# EAGLE board LED_Matrix (EAGLE 6.2)
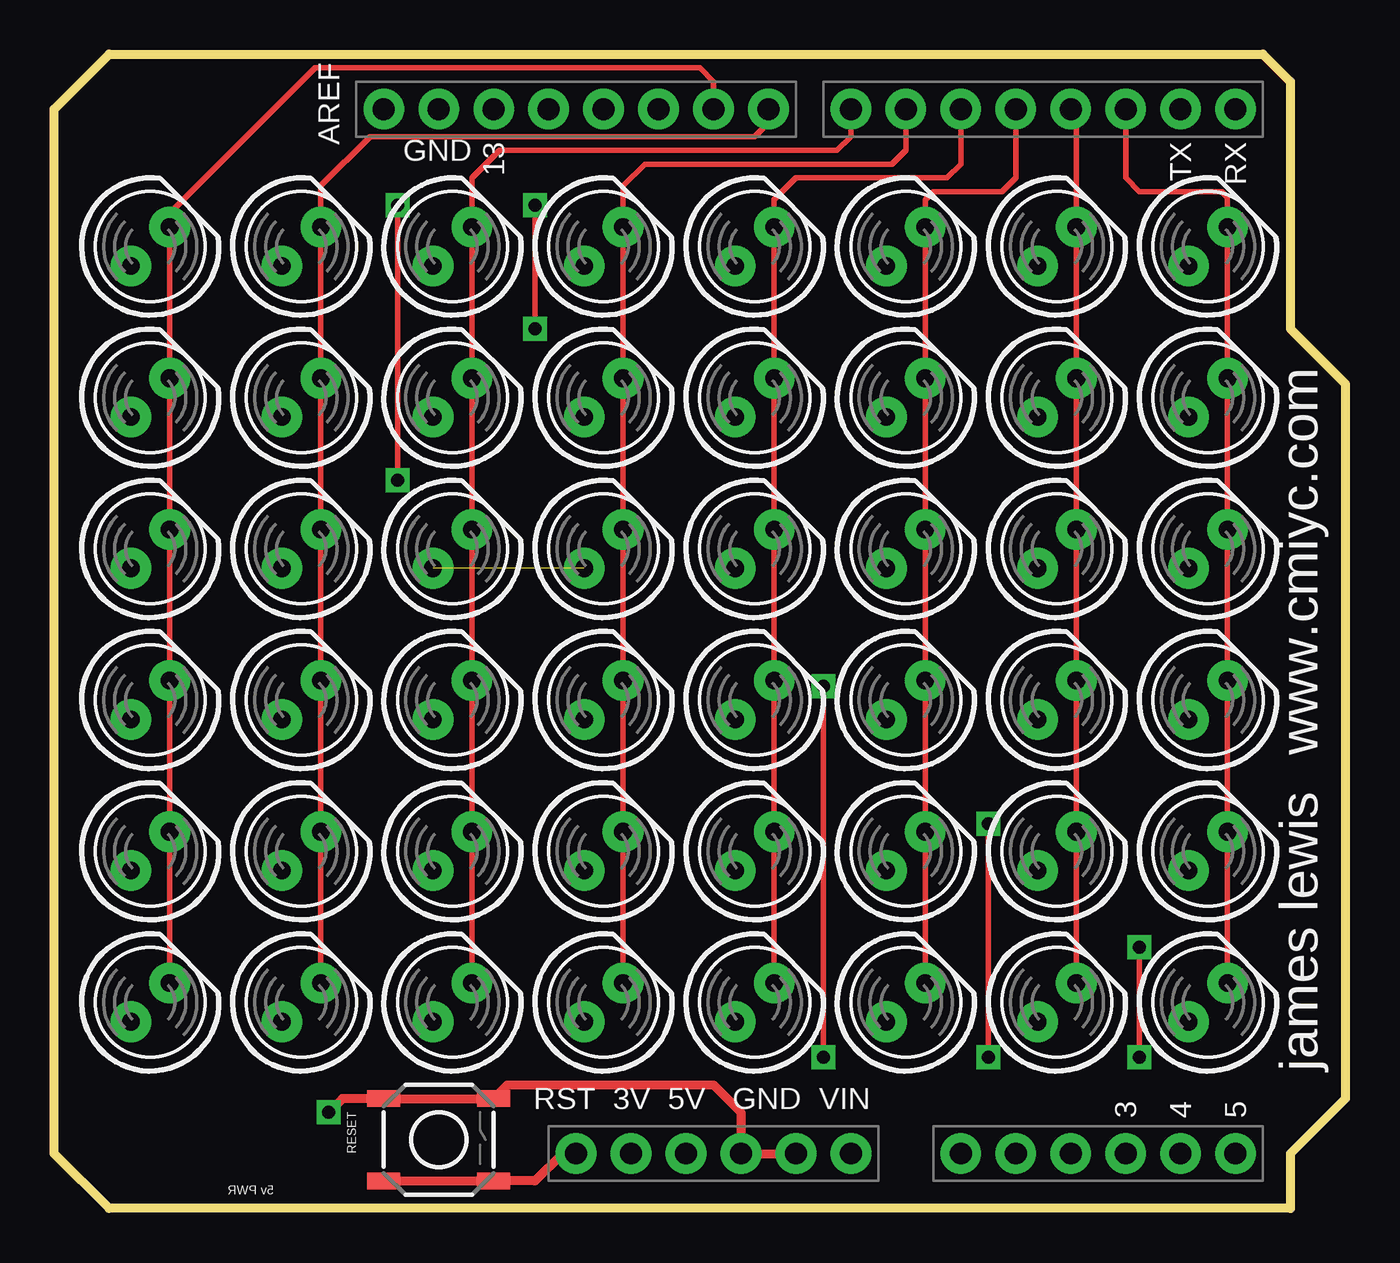
[diagram p0: board, top side]
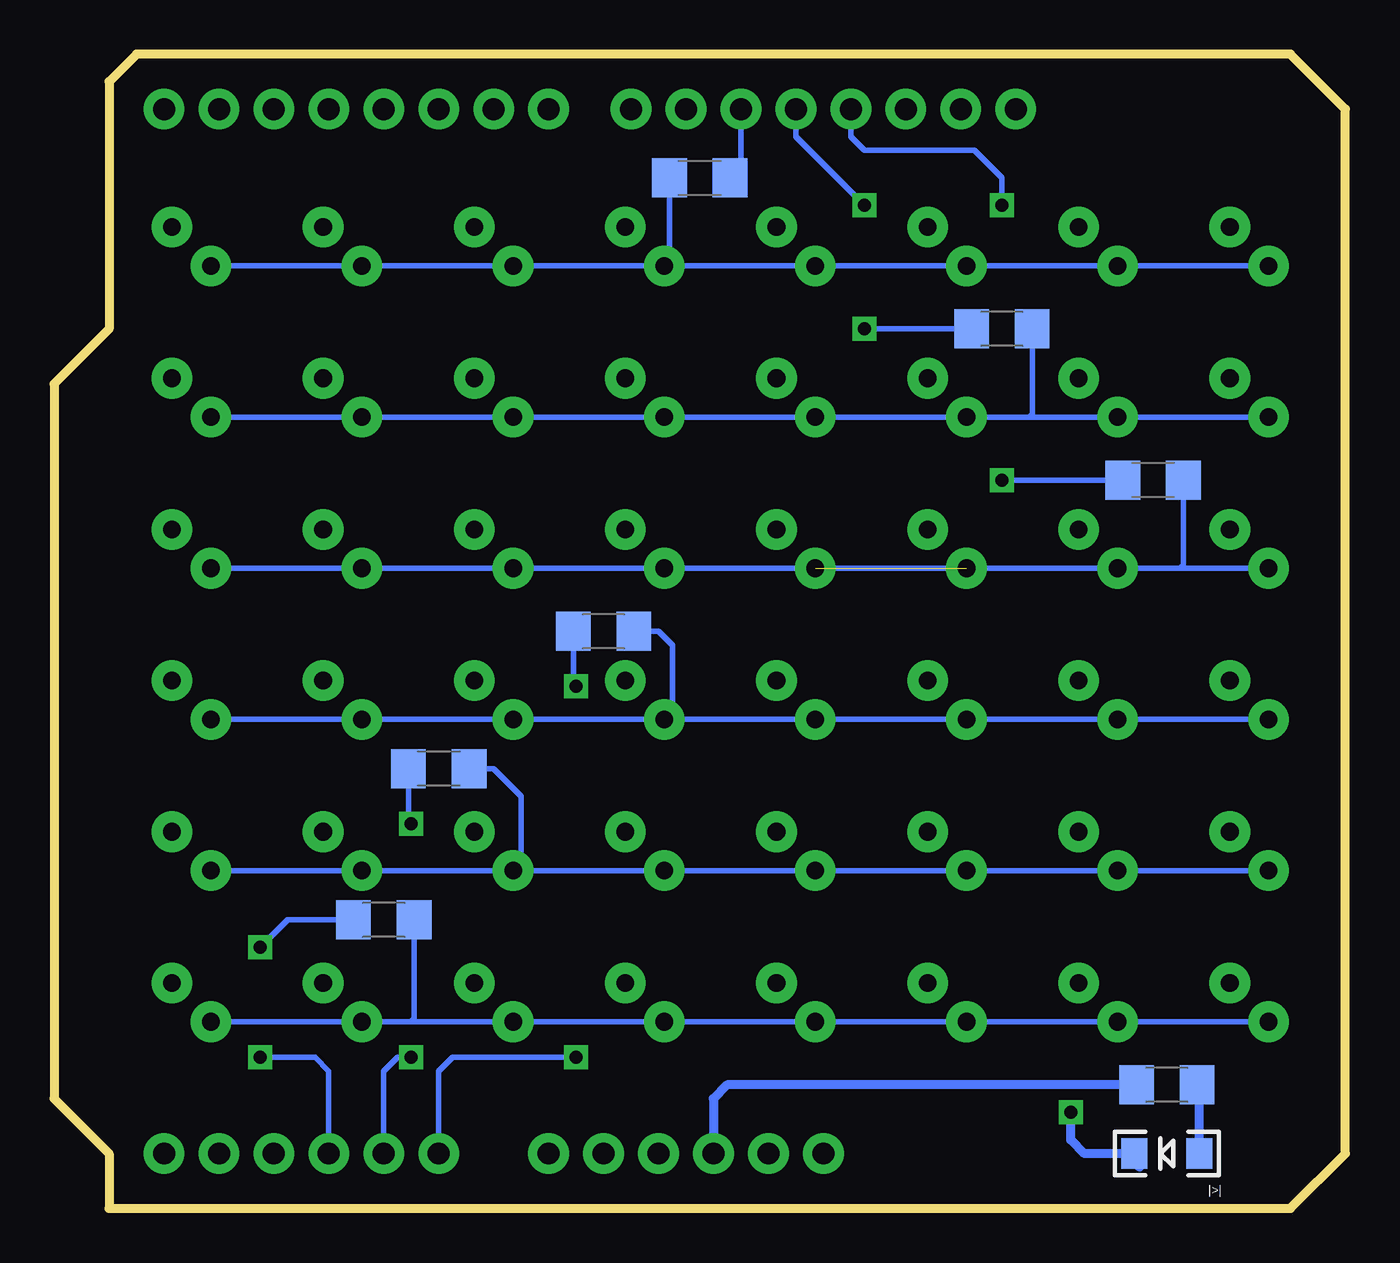
[diagram p1: board, bottom side, seen from below]

Size 59.69 x 53.34 mm. Coordinates in mm from the lower left corner, seen from the top.
Outline: 2.54,0 0,2.54 0,50.8 2.54,53.34 55.88,53.34 57.15,52.07 57.15,40.64 59.69,38.1 59.69,5.08 57.15,2.54 57.15,0 2.54,0
Copper layers (1*16): Top 0.035mm / dielectric 1.5mm / Bottom 0.035mm
Design rules: minimum track width 8mil, minimum drill 20mil, track to track 8mil, track to pad 8mil, pad to pad 8mil, via to via 8mil, smd to smd 8mil, copper to edge 10mil, drill to drill 8mil, minimum pad ring 12mil, minimum via ring 10mil, stop-mask expansion 4mil, vias tented up to drill 25mil, thermal gap 10mil

## Footprints (pad centres in the part's own frame; a part is rotated, then mirrored left to right if it is on the bottom)
LED-1206 = smd 1.2 x 1.4: A -1.5,0; C 1.5,0
LED5MM = drill 0.813 pad 1.88: A -1.27,0; K 1.27,0
1206 = smd 1.6 x 1.8: 1 -1.4,0; 2 1.4,0
TACTILE_SWITCH_SMD = smd 1.524 x 0.762: 1 -2.54,1.905; 2 2.54,1.905; 3 -2.54,-1.905; 4 2.54,-1.905
DUEMILANOVE_SHIELD_NOHOLES = drill 1.016 pad 1.88: 3.3V 50.8,26.67; 5V 50.8,29.21; A0 50.8,41.91; A1 50.8,44.45; A2 50.8,46.99; A3 50.8,49.53; A4 50.8,52.07; A5 50.8,54.61; AREF 2.54,15.24; D2 2.54,49.53; D3 2.54,46.99; D4 2.54,44.45; D5 2.54,41.91; D6 2.54,39.37; D7 2.54,36.83; D8 2.54,33.02; D9 2.54,30.48; D10 2.54,27.94; D11 2.54,25.4; D12 2.54,22.86; D13 2.54,20.32; GND@0 50.8,31.75; GND@1 50.8,34.29; GND@2 2.54,17.78; RES 50.8,24.13; RX 2.54,54.61; TX 2.54,52.07; VIN 50.8,36.83

## Placement (x,y rotation side)
5V  [LED-1206]  8.26,2.54 180 bottom
LED1  [LED5MM]  53.34,44.45 45 top
LED2  [LED5MM]  46.35,44.45 45 top
LED3  [LED5MM]  39.37,44.45 45 top
LED4  [LED5MM]  32.38,44.45 45 top
LED5  [LED5MM]  25.4,44.45 45 top
LED6  [LED5MM]  18.41,44.45 45 top
LED7  [LED5MM]  11.43,44.45 45 top
LED8  [LED5MM]  4.45,44.45 45 top
LED9  [LED5MM]  53.34,37.47 45 top
LED10  [LED5MM]  46.35,37.47 45 top
LED11  [LED5MM]  39.37,37.47 45 top
LED12  [LED5MM]  32.38,37.47 45 top
LED13  [LED5MM]  25.4,37.47 45 top
LED14  [LED5MM]  18.41,37.47 45 top
LED15  [LED5MM]  11.43,37.47 45 top
LED16  [LED5MM]  4.45,37.47 45 top
LED17  [LED5MM]  53.34,30.48 45 top
LED18  [LED5MM]  46.35,30.48 45 top
LED19  [LED5MM]  39.37,30.48 45 top
LED20  [LED5MM]  32.38,30.48 45 top
LED21  [LED5MM]  25.4,30.48 45 top
LED22  [LED5MM]  18.41,30.48 45 top
LED23  [LED5MM]  11.43,30.48 45 top
LED24  [LED5MM]  4.45,30.48 45 top
LED25  [LED5MM]  53.34,23.5 45 top
LED26  [LED5MM]  46.35,23.5 45 top
LED27  [LED5MM]  39.37,23.5 45 top
LED28  [LED5MM]  32.38,23.5 45 top
LED29  [LED5MM]  25.4,23.5 45 top
LED30  [LED5MM]  18.41,23.5 45 top
LED31  [LED5MM]  11.43,23.5 45 top
LED32  [LED5MM]  4.45,23.5 45 top
LED33  [LED5MM]  53.34,16.51 45 top
LED34  [LED5MM]  46.35,16.51 45 top
LED35  [LED5MM]  39.37,16.51 45 top
LED36  [LED5MM]  32.38,16.51 45 top
LED37  [LED5MM]  25.4,16.51 45 top
LED38  [LED5MM]  18.41,16.51 45 top
LED39  [LED5MM]  11.43,16.51 45 top
LED40  [LED5MM]  4.45,16.51 45 top
LED41  [LED5MM]  53.34,9.53 45 top
LED42  [LED5MM]  46.35,9.53 45 top
LED43  [LED5MM]  39.37,9.53 45 top
LED44  [LED5MM]  32.38,9.53 45 top
LED45  [LED5MM]  25.4,9.53 45 top
LED46  [LED5MM]  18.41,9.53 45 top
LED47  [LED5MM]  11.43,9.53 45 top
LED48  [LED5MM]  4.45,9.53 45 top
R0  [1206]  29.84,47.62 0 bottom
R1  [1206]  15.88,40.64 180 bottom
R2  [1206]  8.89,33.66 180 bottom
R3  [1206]  34.29,26.67 180 bottom
R4  [1206]  41.91,20.32 180 bottom
R5  [1206]  44.45,13.34 180 bottom
R6  [1206]  8.26,5.71 180 bottom
S1  [TACTILE_SWITCH_SMD]  17.78,3.17 0 top
U1  ARDUINO_SHIELDNOHOLES  [DUEMILANOVE_SHIELD_NOHOLES]  0,53.34 270 top

## Library data of the parts
5V LED1-LED48 R0 R1-R6 S1 = SparkFun
U1 = SparkFun2

## Nets
COL_0: LED1.K LED9.K LED17.K LED25.K LED33.K LED41.K U1.D2
COL_1: LED2.K LED10.K LED18.K LED26.K LED34.K LED42.K U1.D3
COL_2: LED3.K LED11.K LED19.K LED27.K LED35.K LED43.K U1.D4
COL_3: LED4.K LED12.K LED20.K LED28.K LED36.K LED44.K U1.D5
COL_4: LED5.K LED13.K LED21.K LED29.K LED37.K LED45.K U1.D6
COL_5: LED6.K LED14.K LED22.K LED30.K LED38.K LED46.K U1.D7
COL_6: LED7.K LED15.K LED23.K LED31.K LED39.K LED47.K U1.D8
COL_7: LED8.K LED16.K LED24.K LED32.K LED40.K LED48.K U1.D9
GND: 5V.C S1.1 S1.2 U1.GND@0 U1.GND@1
N$1: LED41.A LED42.A LED43.A LED44.A LED45.A LED46.A LED47.A LED48.A R5.1
N$3: 5V.A R6.1
OLD_1: LED1.A LED2.A LED3.A LED4.A LED5.A LED6.A LED7.A LED8.A R0.1
OLD_2: LED9.A LED10.A LED11.A LED12.A LED13.A LED14.A LED15.A LED16.A R1.1
OLD_3: LED17.A LED18.A LED19.A LED20.A LED21.A LED22.A LED23.A LED24.A R2.1
OLD_4: LED25.A LED26.A LED27.A LED28.A LED29.A LED30.A LED31.A LED32.A R3.1
OLD_5: LED33.A LED34.A LED35.A LED36.A LED37.A LED38.A LED39.A LED40.A R4.1
RESET: S1.3 S1.4 U1.RES
ROW_0: R0.2 U1.D10
ROW_1: R1.2 U1.D11
ROW_2: R2.2 U1.D12
ROW_3: R3.2 U1.A0
ROW_4: R4.2 U1.A1
ROW_5: R5.2 U1.A2
VCC: R6.2 U1.5V

## Tracks (layer width: path | path; a pad name or v marks a point on that pad's centre or on a via)
COL_0
  Top 0.254: LED41.K LED33.K LED25.K LED17.K LED9.K LED1.K 54.24,46.73 53.98,46.99 50.16,46.99 49.53,47.62 U1.D2
COL_1
  Top 0.254: LED42.K LED34.K LED26.K LED18.K LED10.K LED2.K 47.25,50.54 U1.D3
COL_2
  Top 0.254: LED43.K LED35.K LED27.K LED19.K LED11.K LED3.K 40.27,46.62 40.64,46.99 43.81,46.99 44.45,47.62 U1.D4
COL_3
  Top 0.254: LED44.K LED36.K LED28.K LED20.K LED12.K LED4.K 33.28,46.62 34.29,47.62 41.27,47.62 41.91,48.26 U1.D5
COL_4
  Top 0.254: LED45.K LED37.K LED29.K LED21.K LED13.K LED5.K 26.3,47.25 27.3,48.26 38.73,48.26 39.37,48.9 U1.D6
COL_5
  Top 0.254: LED46.K LED38.K LED30.K LED22.K LED14.K LED6.K 19.31,47.62 20.58,48.9 36.2,48.9 36.83,49.53 U1.D7
COL_6
  Top 0.254: LED47.K LED39.K LED31.K LED23.K LED15.K LED7.K 12.33,47.25 14.61,49.53 32.38,49.53 33.02,50.16 U1.D8
COL_7
  Top 0.254: LED48.K LED40.K LED32.K LED24.K LED16.K LED8.K 5.34,45.98 12.06,52.7 29.84,52.7 30.48,52.07 U1.D9
GND  (via drill 0.6)
  Top 0.406: U1.GND@1 U1.GND@0 31.75,4.45 30.48,5.71 20.95,5.71 S1.2 S1.1 13.34,5.08 v12.7,4.45
  Bottom 0.406: v12.7,4.45 12.7,3.17 12.06,2.54 10.16,2.54 9.53,1.91 9.53,2.31 5V.C
N$1
  Bottom 0.254: LED41.A LED42.A 43.18,8.63 | 43.18,8.63 LED43.A LED44.A LED45.A LED46.A LED47.A LED48.A | R5.1 43.05,8.76 43.18,8.63
N$3
  Bottom 0.406: 5V.A 6.75,5.62 R6.1
OLD_1
  Bottom 0.254: LED4.A LED3.A LED2.A LED1.A | LED4.A LED5.A LED6.A LED7.A LED8.A | R0.1 31.25,43.79 LED4.A
OLD_2
  Bottom 0.254: LED9.A LED10.A LED11.A LED12.A LED13.A LED14.A 14.61,36.57 | 14.61,36.57 LED15.A LED16.A | R1.1 14.47,36.7 14.61,36.57
OLD_3  (1 unrouted)
  Bottom 0.254: LED24.A 7.62,29.58 | 7.62,29.58 LED23.A LED21.A LED20.A LED19.A LED18.A LED17.A | R2.1 7.49,29.71 7.62,29.58
OLD_4
  Bottom 0.254: LED25.A LED26.A LED27.A LED28.A | LED28.A LED29.A LED30.A LED31.A LED32.A | R3.1 31.75,26.67 31.11,26.04 31.11,22.97 LED28.A
OLD_5
  Bottom 0.254: LED35.A LED36.A LED37.A LED38.A LED39.A LED40.A | LED35.A LED34.A LED33.A | R4.1 39.37,20.32 38.1,19.05 38.1,15.98 LED35.A
RESET
  Top 0.406: S1.3 S1.4 22.23,1.27 23.5,2.54 U1.RES
ROW_0
  Bottom 0.254: U1.D10 27.94,48.13 R0.2
ROW_1  (via drill 0.6)
  Top 0.254: v22.23,40.64 v22.23,46.35
  Bottom 0.254: R1.2 v22.23,40.64 | v22.23,46.35 25.4,49.53 U1.D11
ROW_2  (via drill 0.6)
  Top 0.254: v15.88,33.66 v15.88,46.35
  Bottom 0.254: R2.2 v15.88,33.66 | v15.88,46.35 15.88,47.62 17.14,48.9 22.23,48.9 22.86,49.53 U1.D12
ROW_3  (via drill 0.6)
  Top 0.254: v35.56,6.99 v35.56,24.13
  Bottom 0.254: R3.2 35.69,24.26 v35.56,24.13 | v35.56,6.99 41.27,6.99 41.91,6.35 U1.A0
ROW_4  (via drill 0.6)
  Top 0.254: v43.18,6.99 v43.18,17.78
  Bottom 0.254: R4.2 43.31,17.91 v43.18,17.78 | v43.18,6.99 43.81,6.99 44.45,6.35 U1.A1
ROW_5  (via drill 0.6)
  Top 0.254: v50.16,6.99 v50.16,12.06
  Bottom 0.254: R5.2 48.9,13.34 v50.16,12.06 | v50.16,6.99 47.62,6.99 46.99,6.35 U1.A2
VCC
  Bottom 0.406: R6.2 28.57,5.71 29.21,5.08 U1.5V

## Text on the board
tPlace: www.cmiyc.com | james lewis | RESET | 5v PWR
bPlace: |>|